# Altium PCB Template_Manufact.PcbDoc (part 2 of 2)
Units mm, origin at the board's own origin, x right, y up, seen from the top; angles counter-clockwise.
Board outline 196 x 280 mm, 2 copper layers (Top Layer, Bottom Layer); 129 components, 42 nets, 507 pads, 102 vias.
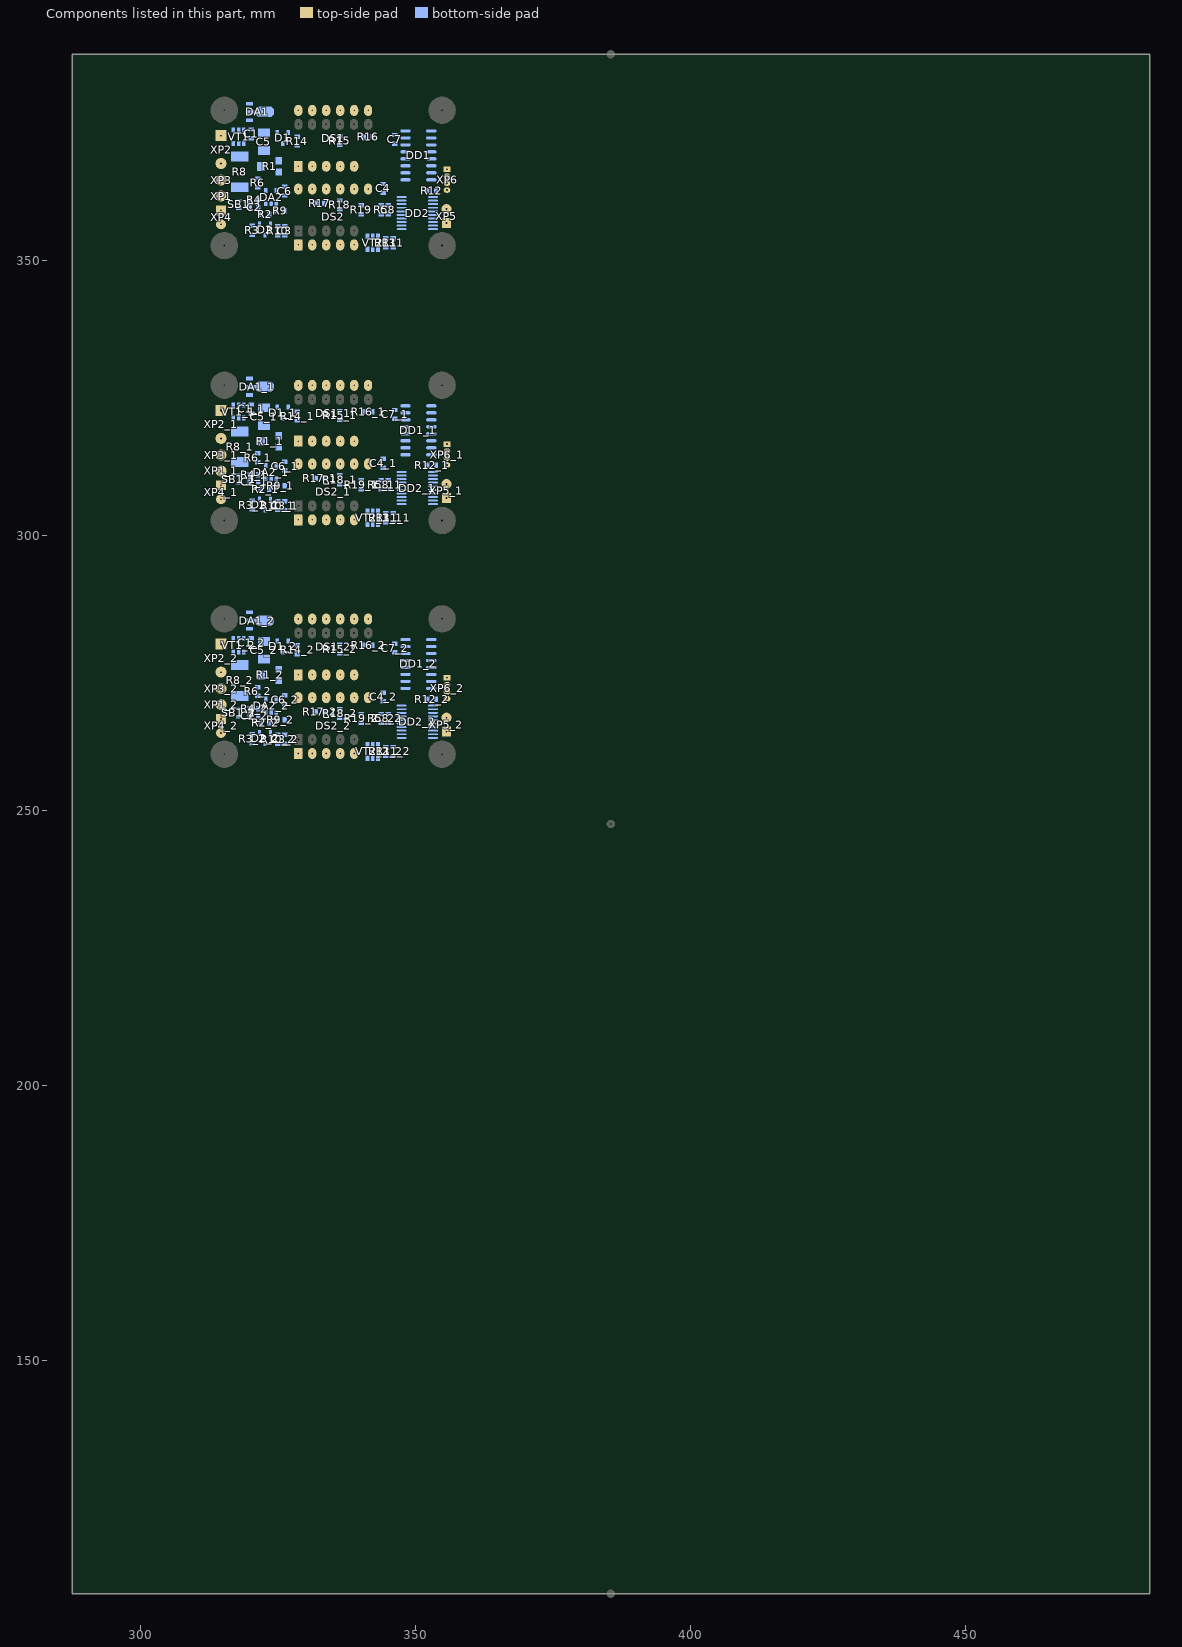
[diagram p2: the components of this part, seen from the top]

## Via types
v1: diameter 1, hole 0.3, Top Layer to Bottom Layer, 102 vias

## Nets (pads, with @x,y where several pads share a name; then routed paths per layer and width w, separated by ;. In a path a pad name is that pad's centre, name@x,y a point inside that pad or via, vN(x,y) a via of type N, cw(c..) or ccw(c..) an arc to the next point about the centre after c; other vN are vias at no path point) (continued)
copper on no net: | length 3073.2
  Top Layer w0.3: v1(327.5,265.5) 328.4,266.4 331.9,266.4 332.7,265.6 335.1,265.6 337.8,268.3 v1@344,268.3 ; v1(327.5,308) 328.4,308.9 331.9,308.9 332.7,308.1 335.1,308.1 337.8,310.8 v1@344,310.8 ; v1(327.5,358) 328.4,358.9 331.9,358.9 332.7,358.1 335.1,358.1 337.8,360.8 v1@344,360.8 ; v1(328.2,276.7) 328.2,278.3 329.8,279.9 342.1,279.9 342.9,280.7 342.9,284.4 343.4,284.9 346.554,284.9 347.977,283.477 v1(347.865,283.477) ; v1(328.2,319.2) 328.2,320.8 329.8,322.4 342.1,322.4 342.9,323.2 342.9,326.9 343.4,327.4 346.554,327.4 347.977,325.977 v1(347.865,325.977) ; v1(328.2,369.2) 328.2,370.8 329.8,372.4 342.1,372.4 342.9,373.2 342.9,376.9 343.4,377.4 346.554,377.4 347.977,375.977 v1(347.865,375.977) ; v1@329,265.5 v1(329,265.35) 329.4,265.75 331.75,265.75 332.5,265 341.8,265 342.3,265.5 v1(342.3,265.6) v1@342.3,265.75 ; v1@329,308 v1(329,307.85) 329.4,308.25 331.75,308.25 332.5,307.5 341.8,307.5 342.3,308 v1(342.3,308.1) v1@342.3,308.25 ; v1@329,358 v1(329,357.85) 329.4,358.25 331.75,358.25 332.5,357.5 341.8,357.5 342.3,358 v1(342.3,358.1) v1@342.3,358.25 ; v1(331.1,278.8) 331.2,278.9 342.1,278.9 343.5,280.3 343.5,283.5 v1(343.9,283.9) ; v1(331.1,321.3) 331.2,321.4 342.1,321.4 343.5,322.8 343.5,326 v1(343.9,326.4) ; v1(331.1,371.3) 331.2,371.4 342.1,371.4 343.5,372.8 343.5,376 v1(343.9,376.4) ; v1(331.2,264.8) 331.8,264.8 332.2,264.4 339.8,264.4 342.4,261.8 v1(349.2,261.8) ; v1(331.2,307.3) 331.8,307.3 332.2,306.9 339.8,306.9 342.4,304.3 v1(349.2,304.3) ; v1(331.2,357.3) 331.8,357.3 332.2,356.9 339.8,356.9 342.4,354.3 v1(349.2,354.3) ; v1(333.5,266.6) 335.2,266.6 337.5,268.9 343,268.9 343.7,269.6 344.6,269.6 348.7,265.5 350.7,265.5 351.1,265.1 351.1,263.8 v1(350.2,262.9) ; v1(333.5,309.1) 335.2,309.1 337.5,311.4 343,311.4 343.7,312.1 344.6,312.1 348.7,308 350.7,308 351.1,307.6 351.1,306.3 v1(350.2,305.4) ; v1(333.5,359.1) 335.2,359.1 337.5,361.4 343,361.4 343.7,362.1 344.6,362.1 348.7,358 350.7,358 351.1,357.6 351.1,356.3 v1(350.2,355.4) ; v1(333.8,277) 334.7,277 335.625,276.075 339.825,276.075 340.6,275.3 355,275.3 v1(355.6,275.9) ; v1(333.8,319.5) 334.7,319.5 335.625,318.575 339.825,318.575 340.6,317.8 355,317.8 v1(355.6,318.4) ; v1(333.8,369.5) 334.7,369.5 335.625,368.575 339.825,368.575 340.6,367.8 355,367.8 v1(355.6,368.4) ; v1(336.3,277) 337.7,278.4 342.5,278.4 344.1,280 344.1,282.7 v1(345.3,283.9) ; v1(336.3,319.5) 337.7,320.9 342.5,320.9 344.1,322.5 344.1,325.2 v1(345.3,326.4) ; v1(336.3,369.5) 337.7,370.9 342.5,370.9 344.1,372.5 344.1,375.2 v1(345.3,376.4) ; v1(337.8,266.7) 344,266.7 346.6,264.1 v1@350,264.1 ; v1(337.8,309.2) 344,309.2 346.6,306.6 v1@350,306.6 ; v1(337.8,359.2) 344,359.2 346.6,356.6 v1@350,356.6 ; v1(338.9,277.5) 342.7,277.5 343.8,276.4 352.6,276.4 354.7,278.5 v1(355.6,278.5) ; v1(338.9,320) 342.7,320 343.8,318.9 352.6,318.9 354.7,321 v1(355.6,321) ; v1(338.9,370) 342.7,370 343.8,368.9 352.6,368.9 354.7,371 v1(355.6,371) ; v1@341,276.4 341.5,275.9 353.8,275.9 355.1,277.2 v1(355.6,277.2) ; v1@341,318.9 341.5,318.4 353.8,318.4 355.1,319.7 v1(355.6,319.7) ; v1@341,368.9 341.5,368.4 353.8,368.4 355.1,369.7 v1(355.6,369.7) ; v1(346.6,270.3) 346.6,271.3 348.13,272.83 355.7,272.83 ; v1(346.6,312.8) 346.6,313.8 348.13,315.33 355.7,315.33 ; v1(346.6,362.8) 346.6,363.8 348.13,365.33 355.7,365.33 ; v1(348.9,270.2) 355.61,270.2 355.7,270.29 ; v1(348.9,312.7) 355.61,312.7 355.7,312.79 ; v1(348.9,362.7) 355.61,362.7 355.7,362.79 ; 355.7,274.1 356.9,274.1 ; 355.7,316.6 356.9,316.6 ; 355.7,366.6 356.9,366.6
  Top Layer w0.5: v1(325.7,277.4) 327,276.1 327,273.733 327.097,273.636 327.097,273.603 327.8,272.9 339.8,272.9 340.3,273.4 v1(346,273.4) 346.7,274.1 355.7,274.1 ; v1(325.7,319.9) 327,318.6 327,316.233 327.097,316.136 327.097,316.103 327.8,315.4 339.8,315.4 340.3,315.9 v1(346,315.9) 346.7,316.6 355.7,316.6 ; v1(325.7,369.9) 327,368.6 327,366.233 327.097,366.136 327.097,366.103 327.8,365.4 339.8,365.4 340.3,365.9 v1(346,365.9) 346.7,366.6 355.7,366.6 ; v1(346.3,281.5) 354.6,281.5 356.9,279.2 356.9,274.1 356.9,269 356.6,268.7 355.1,268.7 354,267.6 354,267.4 ; v1(346.3,324) 354.6,324 356.9,321.7 356.9,316.6 356.9,311.5 356.6,311.2 355.1,311.2 354,310.1 354,309.9 ; v1(346.3,374) 354.6,374 356.9,371.7 356.9,366.6 356.9,361.5 356.6,361.2 355.1,361.2 354,360.1 354,359.9 ; v1(350.3,267.4) 354,267.4 ; v1(350.3,309.9) 354,309.9 ; v1(350.3,359.9) 354,359.9 ; 356,264.3 355.7,264.3 355.5,264.3 354,265.8 354,267.4 ; 356,306.8 355.7,306.8 355.5,306.8 354,308.3 354,309.9 ; 356,356.8 355.7,356.8 355.5,356.8 354,358.3 354,359.9
  Top Layer w1: 313.15,258.2 313.15,262.9 ; 313.15,282.1 313.15,286.8 ; 313.15,300.7 313.15,305.4 ; 313.15,324.6 313.15,329.3 ; 313.15,350.7 313.15,355.4 ; 313.15,374.6 313.15,379.3 ; 313.2,258.15 317.9,258.15 ; 313.2,286.85 317.9,286.85 ; 313.2,300.65 317.9,300.65 ; 313.2,329.35 317.9,329.35 ; 313.2,350.65 317.9,350.65 ; 313.2,379.35 317.9,379.35 ; 321.2,276.5 321.2,277.8 ; 321.2,319 321.2,320.3 ; 321.2,369 321.2,370.3 ; 321.8,260.4 321.8,261.9 ; 321.8,302.9 321.8,304.4 ; 321.8,352.9 321.8,354.4 ; 352.1,286.85 356.8,286.85 ; 352.1,329.35 356.8,329.35 ; 352.1,379.35 356.8,379.35 ; 352.672,258.15 356.8,258.15 ; 352.672,300.65 356.8,300.65 ; 352.672,350.65 356.8,350.65 ; 356.85,258.2 356.85,262.5 ; 356.85,282.1 356.85,286.8 ; 356.85,300.7 356.85,305 ; 356.85,324.6 356.85,329.3 ; 356.85,350.7 356.85,355 ; 356.85,374.6 356.85,379.3
  Top Layer w1.6: 314.6,266.6 315.9,266.6 317.1,267.8 317.1,277.7 314.6,280.2 ; 314.6,309.1 315.9,309.1 317.1,310.3 317.1,320.2 314.6,322.7 ; 314.6,359.1 315.9,359.1 317.1,360.3 317.1,370.2 314.6,372.7
  Bottom Layer w0: 352.85,274.495 353.795,274.495 ; 352.85,316.995 353.795,316.995 ; 352.85,366.995 353.795,366.995
  Bottom Layer w0.3: 314.6,266.6 317.375,266.6 317.8,267.025 ; 314.6,269.2 317.05,269.2 317.8,268.45 318.25,268.45 318.9,267.8 318.9,264.6 319.7,263.8 320.3,263.8 ; 314.6,309.1 317.375,309.1 317.8,309.525 ; 314.6,311.7 317.05,311.7 317.8,310.95 318.25,310.95 318.9,310.3 318.9,307.1 319.7,306.3 320.3,306.3 ; 314.6,359.1 317.375,359.1 317.8,359.525 ; 314.6,361.7 317.05,361.7 317.8,360.95 318.25,360.95 318.9,360.3 318.9,357.1 319.7,356.3 320.3,356.3 ; 316.85,278.8 316.85,277.85 ; 316.85,281.2 316.85,282.15 316.9,282.2 318.4,282.2 ; 316.85,321.3 316.85,320.35 ; 316.85,323.7 316.85,324.65 316.9,324.7 318.4,324.7 ; 316.85,371.3 316.85,370.35 ; 316.85,373.7 316.85,374.65 316.9,374.7 318.4,374.7 ; 317,276.45 316.85,276.6 316.85,277.85 ; 317,318.95 316.85,319.1 316.85,320.35 ; 317,368.95 316.85,369.1 316.85,370.35 ; 318.75,278.8 318.8,278.75 ; 318.75,321.3 318.8,321.25 ; 318.75,371.3 318.8,371.25 ; 319.775,286 318.7,286 318.4,285.7 318.4,282.2 ; 319.775,328.5 318.7,328.5 318.4,328.2 318.4,324.7 ; 319.775,378.5 318.7,378.5 318.4,378.2 318.4,374.7 ; 320.1,281.3 319.2,282.2 318.4,282.2 ; 320.1,323.8 319.2,324.7 318.4,324.7 ; 320.1,373.8 319.2,374.7 318.4,374.7 ; 320.4,262.1 324.9,262.1 325.7,262.1 ; 320.4,304.6 324.9,304.6 325.7,304.6 ; 320.4,354.6 324.9,354.6 325.7,354.6 ; 320.55,278.05 320.4,277.9 316.9,277.9 316.85,277.85 ; 320.55,320.55 320.4,320.4 316.9,320.4 316.85,320.35 ; 320.55,370.55 320.4,370.4 316.9,370.4 316.85,370.35 ; 321.3,270.8 321.3,270.2 322.3,269.2 323.8,269.2 323.8,268.95 ; 321.3,272.4 323.9,272.4 325.092,273.592 ; 321.3,313.3 321.3,312.7 322.3,311.7 323.8,311.7 323.8,311.45 ; 321.3,314.9 323.9,314.9 325.092,316.092 ; 321.3,363.3 321.3,362.7 322.3,361.7 323.8,361.7 323.8,361.45 ; 321.3,364.9 323.9,364.9 325.092,366.092 ; 321.6,267.4 322.2,266.8 322.6,266.8 ; 321.6,309.9 322.2,309.3 322.6,309.3 ; 321.6,359.9 322.2,359.3 322.6,359.3 ; 321.8,265.9 321.1,265.9 320.95,266.05 320.95,266.052 320.6,266.402 320.6,269.5 320.3,269.8 320.3,273.526 321.974,275.2 324.6,275.2 ; 321.8,308.4 321.1,308.4 320.95,308.55 320.95,308.552 320.6,308.902 320.6,312 320.3,312.3 320.3,316.026 321.974,317.7 324.6,317.7 ; 321.8,358.4 321.1,358.4 320.95,358.55 320.95,358.552 320.6,358.902 320.6,362 320.3,362.3 320.3,366.026 321.974,367.7 324.6,367.7 ; 322.562,284.4 324.8,284.4 324.8,280.8 ; 322.562,326.9 324.8,326.9 324.8,323.3 ; 322.562,376.9 324.8,376.9 324.8,373.3 ; 322.6,263.1 322.6,266.8 ; 322.6,305.6 322.6,309.3 ; 322.6,355.6 322.6,359.3 ; 322.75,270.2 322.75,272.35 ; 322.75,312.7 322.75,314.85 ; 322.75,362.7 322.75,364.85 ; 323.4,265.9 323.5,265.9 323.9,265.5 326.2,265.5 ; 323.4,308.4 323.5,308.4 323.9,308 326.2,308 ; 323.4,358.4 323.5,358.4 323.9,358 326.2,358 ; 324.6,266.5 324.3,266.8 323.8,266.8 ; 324.6,309 324.3,309.3 323.8,309.3 ; 324.6,359 324.3,359.3 323.8,359.3 ; 324.65,267.8 324.9,267.8 326.2,266.5 326.2,265.5 ; 324.65,310.3 324.9,310.3 326.2,309 326.2,308 ; 324.65,360.3 324.9,360.3 326.2,359 326.2,358 ; 326.2,262.1 326.5,262.1 327.25,262.85 327.25,263.75 329,265.5 v1(329,265.35) ; 326.2,304.6 326.5,304.6 327.25,305.35 327.25,306.25 329,308 v1(329,307.85) ; 326.2,354.6 326.5,354.6 327.25,355.35 327.25,356.25 329,358 v1(329,357.85) ; v1(327.5,265.5) 326.2,265.5 ; v1(327.5,308) 326.2,308 ; v1(327.5,358) 326.2,358 ; v1@327.507,267.193 326.2,268.5 326.2,269.3 325.85,268.95 323.8,268.95 ; v1@327.507,309.693 326.2,311 326.2,311.8 325.85,311.45 323.8,311.45 ; v1@327.507,359.693 326.2,361 326.2,361.8 325.85,361.45 323.8,361.45 ; v1(327.663,267.35) v1@327.95,267.35 ; v1(327.663,309.85) v1@327.95,309.85 ; v1(327.663,359.85) v1@327.95,359.85 ; v1(328.2,276.7) 328.65,276.25 328.65,274.62 328.65,273.35 327.05,271.75 327.05,269.25 330.1,266.2 330.1,264.8 328.65,263.35 328.65,260.32 ; v1(328.2,319.2) 328.65,318.75 328.65,317.12 328.65,315.85 327.05,314.25 327.05,311.75 330.1,308.7 330.1,307.3 328.65,305.85 328.65,302.82 ; v1(328.2,369.2) 328.65,368.75 328.65,367.12 328.65,365.85 327.05,364.25 327.05,361.75 330.1,358.7 330.1,357.3 328.65,355.85 328.65,352.82 ; 328.5,278.4 329.35,277.55 329.35,276.85 329.9,276.3 329.9,273.2 329.4,272.7 328.8,272.7 327.55,271.45 327.55,269.55 331.2,265.9 v1(331.2,264.8) ; 328.5,280 328.65,280.15 328.65,284.78 ; 328.5,320.9 329.35,320.05 329.35,319.35 329.9,318.8 329.9,315.7 329.4,315.2 328.8,315.2 327.55,313.95 327.55,312.05 331.2,308.4 v1(331.2,307.3) ; 328.5,322.5 328.65,322.65 328.65,327.28 ; 328.5,370.9 329.35,370.05 329.35,369.35 329.9,368.8 329.9,365.7 329.4,365.2 328.8,365.2 327.55,363.95 327.55,362.05 331.2,358.4 v1(331.2,357.3) ; 328.5,372.5 328.65,372.65 328.65,377.28 ; 328.65,270.48 328.65,269.35 330.1,267.9 331.8,267.9 ; 328.65,312.98 328.65,311.85 330.1,310.4 331.8,310.4 ; 328.65,362.98 328.65,361.85 330.1,360.4 331.8,360.4 ; 331.19,260.32 331.19,262.86 332.6,264.27 332.6,268.6 332.3,268.9 330.7,268.9 329.9,269.7 329.9,272 331.19,273.29 331.19,274.62 331.19,275.81 330.4,276.6 330.4,277.9 329.9,278.4 329.9,285.7 330.8,286.6 348.6,286.6 353.3,281.9 353.8,281.9 354.8,280.9 354.8,279.4 353.905,278.505 352.85,278.505 ; 331.19,270.48 331.19,272.29 332.4,273.5 332.4,275.5 331.19,276.71 v1@331.19,278.8 ; v1@331.19,278.89 v1(331.1,278.8) 331.1,284.69 331.19,284.78 ; 331.19,302.82 331.19,305.36 332.6,306.77 332.6,311.1 332.3,311.4 330.7,311.4 329.9,312.2 329.9,314.5 331.19,315.79 331.19,317.12 331.19,318.31 330.4,319.1 330.4,320.4 329.9,320.9 329.9,328.2 330.8,329.1 348.6,329.1 353.3,324.4 353.8,324.4 354.8,323.4 354.8,321.9 353.905,321.005 352.85,321.005 ; 331.19,312.98 331.19,314.79 332.4,316 332.4,318 331.19,319.21 v1@331.19,321.3 ; v1@331.19,321.39 v1(331.1,321.3) 331.1,327.19 331.19,327.28 ; 331.19,352.82 331.19,355.36 332.6,356.77 332.6,361.1 332.3,361.4 330.7,361.4 329.9,362.2 329.9,364.5 331.19,365.79 331.19,367.12 331.19,368.31 330.4,369.1 330.4,370.4 329.9,370.9 329.9,378.2 330.8,379.1 348.6,379.1 353.3,374.4 353.8,374.4 354.8,373.4 354.8,371.9 353.905,371.005 352.85,371.005 ; 331.19,362.98 331.19,364.79 332.4,366 332.4,368 331.19,369.21 v1@331.19,371.3 ; v1@331.19,371.39 v1(331.1,371.3) 331.1,377.19 331.19,377.28 ; v1@333.4,266.7 333.4,267.9 ; v1@333.4,309.2 333.4,310.4 ; v1@333.4,359.2 333.4,360.4 ; 333.73,260.32 333.73,262.86 333.73,264.212 334.4,264.883 334.4,268.5 333.875,269.025 332.975,269.025 332.5,269.5 332.5,272.1 333.73,273.33 333.73,274.62 333.9,274.79 333.8,274.89 v1(333.8,277) ; 333.73,270.48 333.73,272.13 335,273.4 335,279.5 ; 333.73,284.78 333.73,280.77 335.2,279.3 337.1,279.3 v1(338.9,277.5) ; 333.73,302.82 333.73,305.36 333.73,306.712 334.4,307.382 334.4,311 333.875,311.525 332.975,311.525 332.5,312 332.5,314.6 333.73,315.83 333.73,317.12 333.9,317.29 333.8,317.39 v1(333.8,319.5) ; 333.73,312.98 333.73,314.63 335,315.9 335,322 ; 333.73,327.28 333.73,323.27 335.2,321.8 337.1,321.8 v1(338.9,320) ; 333.73,352.82 333.73,355.36 333.73,356.712 334.4,357.383 334.4,361 333.875,361.525 332.975,361.525 332.5,362 332.5,364.6 333.73,365.83 333.73,367.12 333.9,367.29 333.8,367.39 v1(333.8,369.5) ; 333.73,362.98 333.73,364.63 335,365.9 335,372 ; 333.73,377.28 333.73,373.27 335.2,371.8 337.1,371.8 v1(338.9,370) ; 336.2,266.8 336.3,266.7 v1(337.8,266.7) ; 336.2,268.4 336.2,270.41 336.27,270.48 ; 336.2,278.5 338.2,276.5 339.6,276.5 340.5,277.4 341.5,277.4 342,276.9 342,273.1 340.1,271.2 340.1,269.6 341.3,268.4 341.3,265.2 342.675,263.825 347.45,263.825 ; 336.2,280.1 336.27,280.17 336.27,284.78 ; 336.2,282.21 336.235,282.245 ; 336.2,309.3 336.3,309.2 v1(337.8,309.2) ; 336.2,310.9 336.2,312.91 336.27,312.98 ; 336.2,321 338.2,319 339.6,319 340.5,319.9 341.5,319.9 342,319.4 342,315.6 340.1,313.7 340.1,312.1 341.3,310.9 341.3,307.7 342.675,306.325 347.45,306.325 ; 336.2,322.6 336.27,322.67 336.27,327.28 ; 336.2,324.71 336.235,324.745 ; 336.2,359.3 336.3,359.2 v1(337.8,359.2) ; 336.2,360.9 336.2,362.91 336.27,362.98 ; 336.2,371 338.2,369 339.6,369 340.5,369.9 341.5,369.9 342,369.4 342,365.6 340.1,363.7 340.1,362.1 341.3,360.9 341.3,357.7 342.675,356.325 347.45,356.325 ; 336.2,372.6 336.27,372.67 336.27,377.28 ; 336.2,374.71 336.235,374.745 ; 336.27,260.32 336.27,262.86 336.27,265.03 335,266.3 335,272.06 336.27,273.33 336.27,274.62 v1@336.27,276.97 ; 336.27,302.82 336.27,305.36 336.27,307.53 335,308.8 335,314.56 336.27,315.83 336.27,317.12 v1@336.27,319.47 ; 336.27,352.82 336.27,355.36 336.27,357.53 335,358.8 335,364.56 336.27,365.83 336.27,367.12 v1@336.27,369.47 ; 338.81,260.32 338.81,262.86 338.81,267.79 337.5,269.1 337.5,272.28 338.81,273.59 338.81,274.62 340.69,276.5 v1(341,276.5) ; 338.81,270.48 338.8,270.47 338.8,268.8 340.1,267.5 ; 338.81,284.78 338.78,284.75 338.78,282.24 338.78,280.82 339.6,280 340.55,280 ; 338.81,302.82 338.81,305.36 338.81,310.29 337.5,311.6 337.5,314.78 338.81,316.09 338.81,317.12 340.69,319 v1(341,319) ; 338.81,312.98 338.8,312.97 338.8,311.3 340.1,310 ; 338.81,327.28 338.78,327.25 338.78,324.74 338.78,323.32 339.6,322.5 340.55,322.5 ; 338.81,352.82 338.81,355.36 338.81,360.29 337.5,361.6 337.5,364.78 338.81,366.09 338.81,367.12 340.69,369 v1(341,369) ; 338.81,362.98 338.8,362.97 338.8,361.3 340.1,360 ; 338.81,377.28 338.78,377.25 338.78,374.74 338.78,373.32 339.6,372.5 340.55,372.5 ; 339.95,265.75 342.525,263.175 347.45,263.175 ; 339.95,308.25 342.525,305.675 347.45,305.675 ; 339.95,358.25 342.525,355.675 347.45,355.675 ; 341.25,259.5 341.5,259.5 ; 341.25,302 341.5,302 ; 341.25,352 341.5,352 ; 341.35,270.48 342.6,271.73 342.6,278.155 341.35,279.405 341.35,284.78 ; 341.35,312.98 342.6,314.23 342.6,320.655 341.35,321.905 341.35,327.28 ; 341.35,362.98 342.6,364.23 342.6,370.655 341.35,371.905 341.35,377.28 ; 341.6,285 348.9,285 352.85,281.05 ; 341.6,327.5 348.9,327.5 352.85,323.55 ; 341.6,377.5 348.9,377.5 352.85,373.55 ; 342,280.3 342.2,280.1 342.2,279.8 343.2,278.8 343.2,270.8 343.4,270.6 344.9,270.6 345.5,270 345.5,268.9 346,268.4 346,267.507 346.432,267.075 347.45,267.075 ; 342,322.8 342.2,322.6 342.2,322.3 343.2,321.3 343.2,313.3 343.4,313.1 344.9,313.1 345.5,312.5 345.5,311.4 346,310.9 346,310.007 346.432,309.575 347.45,309.575 ; 342,372.8 342.2,372.6 342.2,372.3 343.2,371.3 343.2,363.3 343.4,363.1 344.9,363.1 345.5,362.5 345.5,361.4 346,360.9 346,360.007 346.432,359.575 347.45,359.575 ; v1(342.3,265.6) 343.425,264.475 347.45,264.475 ; v1(342.3,308.1) 343.425,306.975 347.45,306.975 ; v1(342.3,358.1) 343.425,356.975 347.45,356.975 ; 343.15,259.5 343.35,259.7 344.4,259.7 344.6,259.9 344.6,260.4 344.9,260.7 346.6,260.7 349.2,263.3 349.2,265.4 348.825,265.775 347.45,265.775 345.425,265.775 345.3,265.9 ; 343.15,261.9 344.2,261.9 344.6,261.5 345.9,261.5 ; 343.15,302 343.35,302.2 344.4,302.2 344.6,302.4 344.6,302.9 344.9,303.2 346.6,303.2 349.2,305.8 349.2,307.9 348.825,308.275 347.45,308.275 345.425,308.275 345.3,308.4 ; 343.15,304.4 344.2,304.4 344.6,304 345.9,304 ; 343.15,352 343.35,352.2 344.4,352.2 344.6,352.4 344.6,352.9 344.9,353.2 346.6,353.2 349.2,355.8 349.2,357.9 348.825,358.275 347.45,358.275 345.425,358.275 345.3,358.4 ; 343.15,354.4 344.2,354.4 344.6,354 345.9,354 ; 343.7,265.9 343.7,265.4 343.975,265.125 347.45,265.125 ; 343.7,267.5 344.1,267.9 344.1,269.8 ; 343.7,308.4 343.7,307.9 343.975,307.625 347.45,307.625 ; 343.7,310 344.1,310.4 344.1,312.3 ; 343.7,358.4 343.7,357.9 343.975,357.625 347.45,357.625 ; 343.7,360 344.1,360.4 344.1,362.3 ; v1(343.9,283.9) 343.9,280.7 345.1,279.5 346.9,279.5 347.2,279.8 347.925,279.8 ; v1(343.9,326.4) 343.9,323.2 345.1,322 346.9,322 347.2,322.3 347.925,322.3 ; v1(343.9,376.4) 343.9,373.2 345.1,372 346.9,372 347.2,372.3 347.925,372.3 ; 345.25,267.55 346.375,266.425 347.45,266.425 349.325,266.425 v1(350.3,267.4) 351.275,266.425 353.15,266.425 ; 345.25,310.05 346.375,308.925 347.45,308.925 349.325,308.925 v1(350.3,309.9) 351.275,308.925 353.15,308.925 ; 345.25,360.05 346.375,358.925 347.45,358.925 349.325,358.925 v1(350.3,359.9) 351.275,358.925 353.15,358.925 ; v1(345.3,283.9) 346.1,283.9 346.6,284.4 348.5,284.4 351.3,281.6 351.3,280.6 352.125,279.775 352.85,279.775 ; v1(345.3,326.4) 346.1,326.4 346.6,326.9 348.5,326.9 351.3,324.1 351.3,323.1 352.125,322.275 352.85,322.275 ; v1(345.3,376.4) 346.1,376.4 346.6,376.9 348.5,376.9 351.3,374.1 351.3,373.1 352.125,372.275 352.85,372.275 ; 345.9,260 349.975,260 353.15,263.175 ; 345.9,302.5 349.975,302.5 353.15,305.675 ; 345.9,352.5 349.975,352.5 353.15,355.675 ; v1(346,273.4) 346.025,273.425 348.15,273.425 ; v1(346,315.9) 346.025,315.925 348.15,315.925 ; v1(346,365.9) 346.025,365.925 348.15,365.925 ; 346.2,280.3 346.2,280.5 346.2,280.95 346.25,281 346.3,281 347.995,281 ; 346.2,322.8 346.2,323 346.2,323.45 346.25,323.5 346.3,323.5 347.995,323.5 ; 346.2,372.8 346.2,373 346.2,373.45 346.25,373.5 346.3,373.5 347.995,373.5 ; v1(346.6,270.3) 346.6,269.875 347.45,269.025 ; v1(346.6,312.8) 346.6,312.375 347.45,311.525 ; v1(346.6,362.8) 346.6,362.375 347.45,361.525 ; 347.45,267.725 349.025,267.725 350,268.7 350,274 349.3,274.7 348.355,274.7 ; 347.45,268.375 348.875,268.375 349.2,268.7 349.2,269.9 v1(348.9,270.2) ; 347.45,310.225 349.025,310.225 350,311.2 350,316.5 349.3,317.2 348.355,317.2 ; 347.45,310.875 348.875,310.875 349.2,311.2 349.2,312.4 v1(348.9,312.7) ; 347.45,360.225 349.025,360.225 350,361.2 350,366.5 349.3,367.2 348.355,367.2 ; 347.45,360.875 348.875,360.875 349.2,361.2 349.2,362.4 v1(348.9,362.7) ; v1(347.865,283.477) 350.6,280.742 350.6,278.5 351.865,277.235 352.85,277.235 ; v1(347.865,325.977) 350.6,323.242 350.6,321 351.865,319.735 352.85,319.735 ; v1(347.865,375.977) 350.6,373.242 350.6,371 351.865,369.735 352.85,369.735 ; 348.345,278.5 349.6,278.5 351.2,276.9 351.2,268.9 351.725,268.375 353.15,268.375 ; 348.345,321 349.6,321 351.2,319.4 351.2,311.4 351.725,310.875 353.15,310.875 ; 348.345,371 349.6,371 351.2,369.4 351.2,361.4 351.725,360.875 353.15,360.875 ; 348.385,276 349.9,276 350.6,275.3 350.6,268.6 351.475,267.725 353.15,267.725 ; 348.385,318.5 349.9,318.5 350.6,317.8 350.6,311.1 351.475,310.225 353.15,310.225 ; 348.385,368.5 349.9,368.5 350.6,367.8 350.6,361.1 351.475,360.225 353.15,360.225 ; v1(349.2,261.8) 350.5,261.8 351.2,262.5 351.2,263 352.025,263.825 353.15,263.825 ; v1(349.2,304.3) 350.5,304.3 351.2,305 351.2,305.5 352.025,306.325 353.15,306.325 ; v1(349.2,354.3) 350.5,354.3 351.2,355 351.2,355.5 352.025,356.325 353.15,356.325 ; v1(350.2,262.9) 351.775,264.475 353.15,264.475 ; v1(350.2,264.2) 351.125,265.125 353.15,265.125 ; v1(350.2,305.4) 351.775,306.975 353.15,306.975 ; v1(350.2,306.7) 351.125,307.625 353.15,307.625 ; v1(350.2,355.4) 351.775,356.975 353.15,356.975 ; v1(350.2,356.7) 351.125,357.625 353.15,357.625 ; 352.85,273.425 353.725,273.425 354.5,274.2 354.5,274.8 v1(355.6,275.9) ; 352.85,274.695 353.595,274.695 354.5,275.6 354.5,276.2 355.5,277.2 v1(355.6,277.2) ; 352.85,275.965 353.465,275.965 354.6,277.1 354.6,277.9 355.2,278.5 v1(355.6,278.5) ; 352.85,315.925 353.725,315.925 354.5,316.7 354.5,317.3 v1(355.6,318.4) ; 352.85,317.195 353.595,317.195 354.5,318.1 354.5,318.7 355.5,319.7 v1(355.6,319.7) ; 352.85,318.465 353.465,318.465 354.6,319.6 354.6,320.4 355.2,321 v1(355.6,321) ; 352.85,365.925 353.725,365.925 354.5,366.7 354.5,367.3 v1(355.6,368.4) ; 352.85,367.195 353.595,367.195 354.5,368.1 354.5,368.7 355.5,369.7 v1(355.6,369.7) ; 352.85,368.465 353.465,368.465 354.6,369.6 354.6,370.4 355.2,371 v1(355.6,371) ; 353.15,265.775 354.475,265.775 355.8,267.1 ; 353.15,269.025 352.1,270.075 352.1,270.2 352.1,270.9 352.85,271.65 352.85,272.155 353.345,272.155 354,271.5 v1(354.2,271.5) 355.64,271.5 355.7,271.56 ; 353.15,308.275 354.475,308.275 355.8,309.6 ; 353.15,311.525 352.1,312.575 352.1,312.7 352.1,313.4 352.85,314.15 352.85,314.655 353.345,314.655 354,314 v1(354.2,314) 355.64,314 355.7,314.06 ; 353.15,358.275 354.475,358.275 355.8,359.6 ; 353.15,361.525 352.1,362.575 352.1,362.7 352.1,363.4 352.85,364.15 352.85,364.655 353.345,364.655 354,364 v1(354.2,364) 355.64,364 355.7,364.06 ; 353.7,270.2 353.9,270.2 355.8,268.3 355.8,267.1 ; 353.7,312.7 353.9,312.7 355.8,310.8 355.8,309.6 ; 353.7,362.7 353.9,362.7 355.8,360.8 355.8,359.6 ; 355.8,266.84 355.8,267.1 ; 355.8,309.34 355.8,309.6 ; 355.8,359.34 355.8,359.6 ; 322.6,266.8 323.8,266.8 ; 322.6,309.3 323.8,309.3 ; 322.6,359.3 323.8,359.3 ; 323.8,266.8 323.8,268.95 ; 323.8,309.3 323.8,311.45 ; 323.8,359.3 323.8,361.45
  Bottom Layer w0.5: 314.6,264.06 316.14,264.06 321.4,258.8 339.3,258.8 339.6,258.8 340.8,258.8 341.375,259.375 341.5,259.5 342.2,259.5 ; 314.6,280.2 314.8,280 318.75,280 ; 314.6,306.56 316.14,306.56 321.4,301.3 339.3,301.3 339.6,301.3 340.8,301.3 341.375,301.875 341.5,302 342.2,302 ; 314.6,322.7 314.8,322.5 318.75,322.5 ; 314.6,356.56 316.14,356.56 321.4,351.3 339.3,351.3 339.6,351.3 340.8,351.3 341.375,351.875 341.5,352 342.2,352 ; 314.6,372.7 314.8,372.5 318.75,372.5 ; 317.8,278.8 318.75,278.8 318.75,280 ; 317.8,281.2 318.75,281.2 318.75,280 ; 317.8,321.3 318.75,321.3 318.75,322.5 ; 317.8,323.7 318.75,323.7 318.75,322.5 ; 317.8,371.3 318.75,371.3 318.75,372.5 ; 317.8,373.7 318.75,373.7 318.75,372.5 ; 318.45,270.65 319.8,269.3 319.8,268.5 319.8,267.4 ; 318.45,313.15 319.8,311.8 319.8,311 319.8,309.9 ; 318.45,363.15 319.8,361.8 319.8,361 319.8,359.9 ; 319.775,283 320.6,283 324.8,278.8 325,278.8 ; 319.775,325.5 320.6,325.5 324.8,321.3 325,321.3 ; 319.775,375.5 320.6,375.5 324.8,371.3 325,371.3 ; 320.1,279.7 320.2,279.7 320,279.5 320,278.6 320.55,278.05 321.1,277.5 322.4,277.5 321.9,277 ; 320.1,322.2 320.2,322.2 320,322 320,321.1 320.55,320.55 321.1,320 322.4,320 321.9,319.5 ; 320.1,372.2 320.2,372.2 320,372 320,371.1 320.55,370.55 321.1,370 322.4,370 321.9,369.5 ; 321.6,264.1 321.6,263.1 322.6,263.1 324.3,263.1 324.9,263.7 326.2,263.7 ; 321.6,268.7 322.5,267.8 322.75,267.8 ; 321.6,306.6 321.6,305.6 322.6,305.6 324.3,305.6 324.9,306.2 326.2,306.2 ; 321.6,311.2 322.5,310.3 322.75,310.3 ; 321.6,356.6 321.6,355.6 322.6,355.6 324.3,355.6 324.9,356.2 326.2,356.2 ; 321.6,361.2 322.5,360.3 322.75,360.3 ; 324.65,270.2 325.3,270.2 326.2,271.1 326.2,272.1 327,272.9 327,276.1 v1(325.7,277.4) 325,278.1 325,278.8 ; 324.65,312.7 325.3,312.7 326.2,313.6 326.2,314.6 327,315.4 327,318.6 v1(325.7,319.9) 325,320.6 325,321.3 ; 324.65,362.7 325.3,362.7 326.2,363.6 326.2,364.6 327,365.4 327,368.6 v1(325.7,369.9) 325,370.6 325,371.3 ; 325.8,278.8 325,278.8 ; 325.8,321.3 325,321.3 ; 325.8,371.3 325,371.3 ; 341.25,259.5 341.25,261.9 342.2,261.9 ; 341.25,302 341.25,304.4 342.2,304.4 ; 341.25,352 341.25,354.4 342.2,354.4 ; 344.1,271.4 344.1,276.4 345.1,277.4 v1(346.1,277.4) ; 344.1,313.9 344.1,318.9 345.1,319.9 v1(346.1,319.9) ; 344.1,363.9 344.1,368.9 345.1,369.9 v1(346.1,369.9) ; 346.2,278.7 346.2,277.5 v1(346.1,277.4) ; 346.2,280.3 346.1,280.4 346.2,280.5 346.3,280.6 346.3,281 v1(346.3,281.5) ; 346.2,321.2 346.2,320 v1(346.1,319.9) ; 346.2,322.8 346.1,322.9 346.2,323 346.3,323.1 346.3,323.5 v1(346.3,324) ; 346.2,371.2 346.2,370 v1(346.1,369.9) ; 346.2,372.8 346.1,372.9 346.2,373 346.3,373.1 346.3,373.5 v1(346.3,374) ; 347.95,277.235 346.265,277.235 v1(346.1,277.4) ; 347.95,319.735 346.265,319.735 v1(346.1,319.9) ; 347.95,369.735 346.265,369.735 v1(346.1,369.9) ; 357,257.9 357.1,258 ; 357,300.4 357.1,300.5 ; 357,350.4 357.1,350.5
  Bottom Layer w1: 313.15,258.2 313.15,262.9 ; 313.15,282.1 313.15,286.8 ; 313.15,300.7 313.15,305.4 ; 313.15,324.6 313.15,329.3 ; 313.15,350.7 313.15,355.4 ; 313.15,374.6 313.15,379.3 ; 313.2,258.15 317.9,258.15 ; 313.2,286.85 317.9,286.85 ; 313.2,300.65 317.9,300.65 ; 313.2,329.35 317.9,329.35 ; 313.2,350.65 317.9,350.65 ; 313.2,379.35 317.9,379.35 ; 352.1,258.15 356.8,258.15 ; 352.1,286.85 356.8,286.85 ; 352.1,300.65 356.8,300.65 ; 352.1,329.35 356.8,329.35 ; 352.1,350.65 356.8,350.65 ; 352.1,379.35 356.8,379.35 ; 356.85,258.2 356.85,262.5 ; 356.85,282.1 356.85,286.8 ; 356.85,300.7 356.85,305 ; 356.85,324.6 356.85,329.3 ; 356.85,350.7 356.85,355 ; 356.85,374.6 356.85,379.3
  Bottom Layer w1.6: 314.5,272 315,272 315.6,271.4 316,271.4 316.6,270.8 318,270.8 ; 314.5,314.5 315,314.5 315.6,313.9 316,313.9 316.6,313.3 318,313.3 ; 314.5,364.5 315,364.5 315.6,363.9 316,363.9 316.6,363.3 318,363.3 ; 314.7,275.12 316.03,276.45 317,276.45 ; 314.7,317.62 316.03,318.95 317,318.95 ; 314.7,367.62 316.03,368.95 317,368.95
  other v1: 344.2,268.6 356.4,281.1 325.9,284.1 325.9,285.5 344.2,311.1 356.4,323.6 325.9,326.6 325.9,328 344.2,361.1 356.4,373.6 325.9,376.6 325.9,378

## Polygon pours and split planes (outlines as drawn)
no net on Top Layer "NONET_L01_P058" (solid, pour order 58): 316.787,262.231 317.487,261.531 324.187,261.531 328.387,265.731 328.387,275.831 327.487,276.731 317.687,276.731 316.787,275.831
no net on Top Layer "NONET_L01_P018" (solid, pour order 56): 312.5,287.5 312.5,257.5 357.5,257.5 357.5,287.5
no net on Top Layer "NONET_L01_P050" (solid, pour order 50): 316.787,304.731 317.487,304.031 324.187,304.031 328.387,308.231 328.387,318.331 327.487,319.231 317.687,319.231 316.787,318.331
no net on Top Layer "NONET_L01_P018" (solid, pour order 48): 312.5,330 312.5,300 357.5,300 357.5,330
no net on Top Layer "NONET_L01_P034" (solid, pour order 34): 316.787,354.731 317.487,354.031 324.187,354.031 328.387,358.231 328.387,368.331 327.487,369.231 317.687,369.231 316.787,368.331
no net on Top Layer "NONET_L01_P018" (solid, pour order 32): 312.5,380 312.5,350 357.5,350 357.5,380
no net on Bottom Layer "NONET_L02_P062" (solid, pour order 62): 316.8,261.7 317.5,261 324.2,261 328.4,265.2 328.4,275.3 327.5,276.2 317.7,276.2 316.8,275.3
no net on Bottom Layer "Top Layer-No Net 1" (solid, pour order 60): 312.5,287.5 312.5,257.5 357.5,257.5 357.5,287.5
no net on Bottom Layer "NONET_L02_P054" (solid, pour order 54): 316.8,304.2 317.5,303.5 324.2,303.5 328.4,307.7 328.4,317.8 327.5,318.7 317.7,318.7 316.8,317.8
no net on Bottom Layer "Top Layer-No Net 1" (solid, pour order 52): 312.5,330 312.5,300 357.5,300 357.5,330
no net on Bottom Layer "NONET_L02_P038" (solid, pour order 38): 316.8,354.2 317.5,353.5 324.2,353.5 328.4,357.7 328.4,367.8 327.5,368.7 317.7,368.7 316.8,367.8
no net on Bottom Layer "Top Layer-No Net 1" (solid, pour order 36): 312.5,380 312.5,350 357.5,350 357.5,380

## Keep-outs
Keep-Out Layer:
  lines w0.1: 288.5,247.5 385.5,247.5 ; 385.5,109.238 385.5,247.5 ; 385.5,385.762 385.5,247.5 ; 482.5,247.5 385.5,247.5 ; 287.5,107.5 483.5,107.5 483.5,387.5 287.5,387.5 287.5,107.5
  lines w0.3: 312.5,257.5 312.5,287.5 357.5,287.5 357.5,257.5 312.5,257.5 ; 312.5,300 312.5,330 357.5,330 357.5,300 312.5,300 ; 312.5,350 312.5,380 357.5,380 357.5,350 312.5,350

## Other copper
Top Layer:
  pour cut-out: 316.8,277.2 327,277.2 327,276.9 326.8,276.7 317,276.7
  pour cut-out: 327.5,276.7 328.4,275.8 328.4,265.7 324.2,261.5 317.5,261.5 316.8,262.2 316.8,275.8 317.7,276.7 317.9,276.7 318.4,277.2 327.7,277.2 328.9,276 328.9,265.5 324.4,261 317.3,261 316.3,262 316.3,276 317.5,277.2 318.3,277.2
  pour cut-out: 313.5,275.1 313.5,272.1 314.6,271 315.9,271 315.9,276.101 314.6,276.101
  pour cut-out: 316.8,319.7 327,319.7 327,319.4 326.8,319.2 317,319.2
  pour cut-out: 327.5,319.2 328.4,318.3 328.4,308.2 324.2,304 317.5,304 316.8,304.7 316.8,318.3 317.7,319.2 317.9,319.2 318.4,319.7 327.7,319.7 328.9,318.5 328.9,308 324.4,303.5 317.3,303.5 316.3,304.5 316.3,318.5 317.5,319.7 318.3,319.7
  pour cut-out: 313.5,317.6 313.5,314.6 314.6,313.5 315.9,313.5 315.9,318.601 314.6,318.601
  pour cut-out: 316.8,369.7 327,369.7 327,369.4 326.8,369.2 317,369.2
  pour cut-out: 327.5,369.2 328.4,368.3 328.4,358.2 324.2,354 317.5,354 316.8,354.7 316.8,368.3 317.7,369.2 317.9,369.2 318.4,369.7 327.7,369.7 328.9,368.5 328.9,358 324.4,353.5 317.3,353.5 316.3,354.5 316.3,368.5 317.5,369.7 318.3,369.7
  pour cut-out: 313.5,367.6 313.5,364.6 314.6,363.5 315.9,363.5 315.9,368.601 314.6,368.601
  text "v1.1" at 319.5,377.5 h1.5
  text "24V" at 317.9,371.7 h1.5
  text "GNDi" at 318.4,366.5 h1.5
  text "GNDo" at 318.4,364.2 h1.5
  text "Vmeas" at 318.6,361.1 h1.5
  text "FUN+" at 318,357.6 h1.5
  text "FUN-" at 318,355.5 h1.5
  text "TMP" at 347.5,351 h1.5
  text "v1.1" at 319.5,327.5 h1.5
  text "24V" at 317.9,321.7 h1.5
  text "GNDi" at 318.4,316.5 h1.5
  text "GNDo" at 318.4,314.2 h1.5
  text "Vmeas" at 318.6,311.1 h1.5
  text "FUN+" at 318,307.6 h1.5
  text "FUN-" at 318,305.5 h1.5
  text "TMP" at 347.5,301 h1.5
  text "v1.1" at 319.5,285 h1.5
  text "24V" at 317.9,279.2 h1.5
  text "GNDi" at 318.4,274 h1.5
  text "GNDo" at 318.4,271.7 h1.5
  text "Vmeas" at 318.6,268.6 h1.5
  text "FUN+" at 318,265.1 h1.5
  text "FUN-" at 318,263 h1.5
  text "TMP" at 347.5,258.5 h1.5
Bottom Layer:
  pour cut-out: 327.5,276.2 328.4,275.3 328.4,265.2 324.2,261 317.5,261 316.8,261.7 316.8,275.3 317.7,276.2 317.9,276.2 318.4,276.7 327.7,276.7 328.9,275.5 328.9,265 324.4,260.5 317.3,260.5 316.3,261.5 316.3,275.5 317.5,276.7 318.3,276.7
  pour cut-out: 316.8,277.2 327,277.2 327,276.9 326.8,276.7 317,276.7
  pour cut-out: 316.8,277.2 327,277.2 327,276.9 326.8,276.7 317,276.7
  pour cut-out: 316.8,277.2 327,277.2 327,276.9 326.8,276.7 317,276.7
  pour cut-out: 319.6,277.3
  pour cut-out: 316.4,277.3 320.1,277.3 320.1,269.4 315.9,269.4 315.9,277.8 320.1,277.8 320.1,277.2
  pour cut-out: 313.5,275.1 313.5,272.1 314.6,271 315.9,271 315.9,276.101 314.6,276.101
  pour cut-out: 327.5,318.7 328.4,317.8 328.4,307.7 324.2,303.5 317.5,303.5 316.8,304.2 316.8,317.8 317.7,318.7 317.9,318.7 318.4,319.2 327.7,319.2 328.9,318 328.9,307.5 324.4,303 317.3,303 316.3,304 316.3,318 317.5,319.2 318.3,319.2
  pour cut-out: 316.8,319.7 327,319.7 327,319.4 326.8,319.2 317,319.2
  pour cut-out: 316.8,319.7 327,319.7 327,319.4 326.8,319.2 317,319.2
  pour cut-out: 316.8,319.7 327,319.7 327,319.4 326.8,319.2 317,319.2
  pour cut-out: 319.6,319.8
  pour cut-out: 316.4,319.8 320.1,319.8 320.1,311.9 315.9,311.9 315.9,320.3 320.1,320.3 320.1,319.7
  pour cut-out: 313.5,317.6 313.5,314.6 314.6,313.5 315.9,313.5 315.9,318.601 314.6,318.601
  pour cut-out: 327.5,368.7 328.4,367.8 328.4,357.7 324.2,353.5 317.5,353.5 316.8,354.2 316.8,367.8 317.7,368.7 317.9,368.7 318.4,369.2 327.7,369.2 328.9,368 328.9,357.5 324.4,353 317.3,353 316.3,354 316.3,368 317.5,369.2 318.3,369.2
  pour cut-out: 316.8,369.7 327,369.7 327,369.4 326.8,369.2 317,369.2
  pour cut-out: 316.8,369.7 327,369.7 327,369.4 326.8,369.2 317,369.2
  pour cut-out: 316.8,369.7 327,369.7 327,369.4 326.8,369.2 317,369.2
  pour cut-out: 319.6,369.8
  pour cut-out: 316.4,369.8 320.1,369.8 320.1,361.9 315.9,361.9 315.9,370.3 320.1,370.3 320.1,369.7
  pour cut-out: 313.5,367.6 313.5,364.6 314.6,363.5 315.9,363.5 315.9,368.601 314.6,368.601